# Altium PCB PCB1.PcbDoc
Units mil, origin at the board's own origin, x right, y up, seen from the top; angles counter-clockwise.
Board outline 1496.06 x 1519.69 mil, 4 copper layers (Top Layer, Internal Plane 1, Internal Plane 2, Bottom Layer); 24 components, 31 nets, 133 pads, 22 vias.
Unrouted connection lines stored in the file: 1.
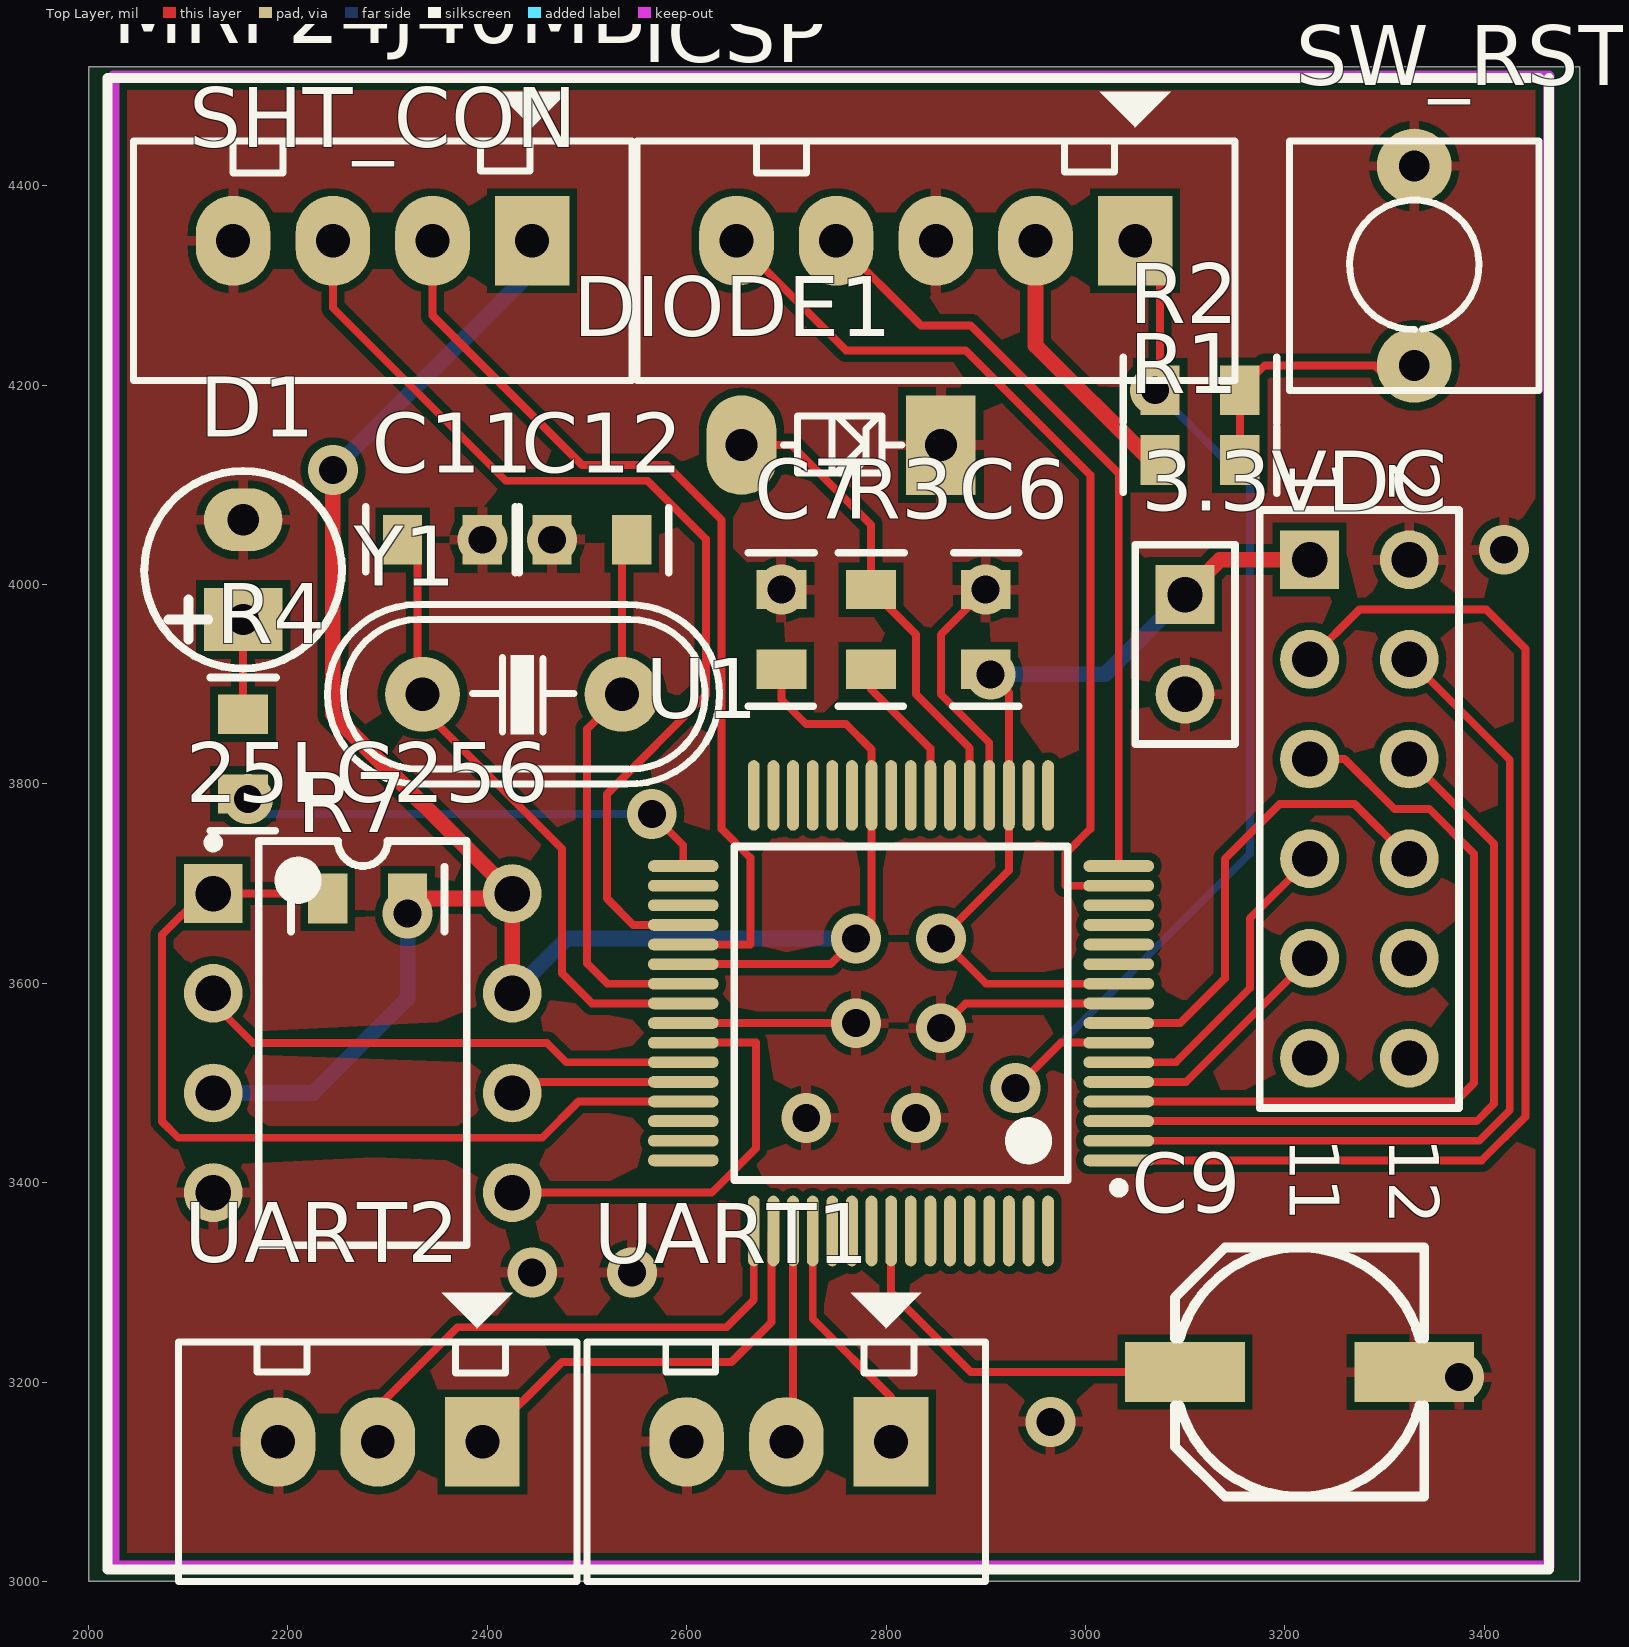
[diagram p0: Top Layer view]
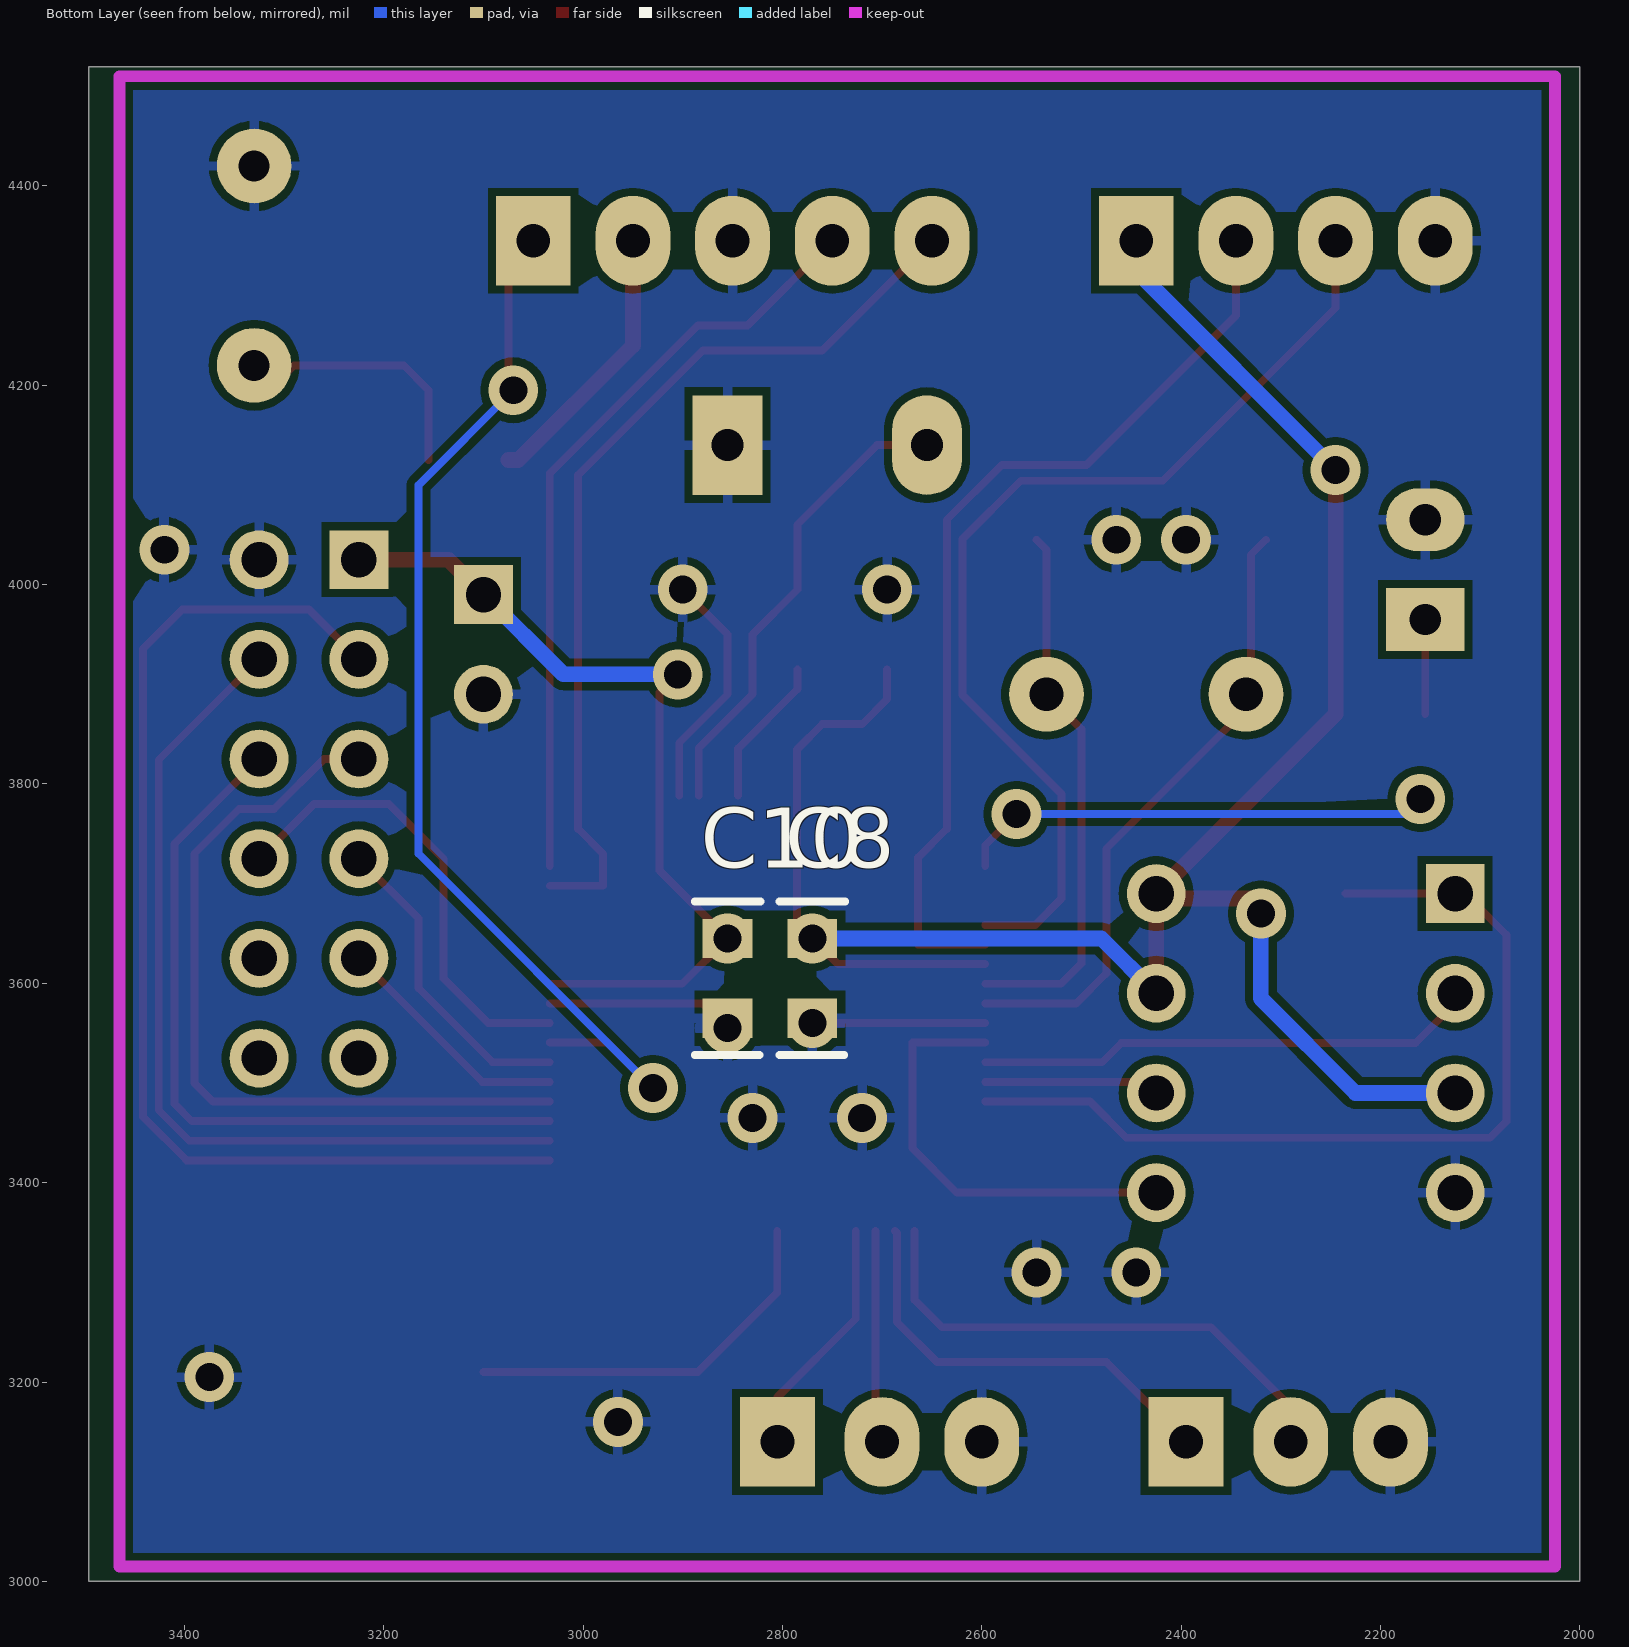
[diagram p1: Bottom Layer view, seen from below]
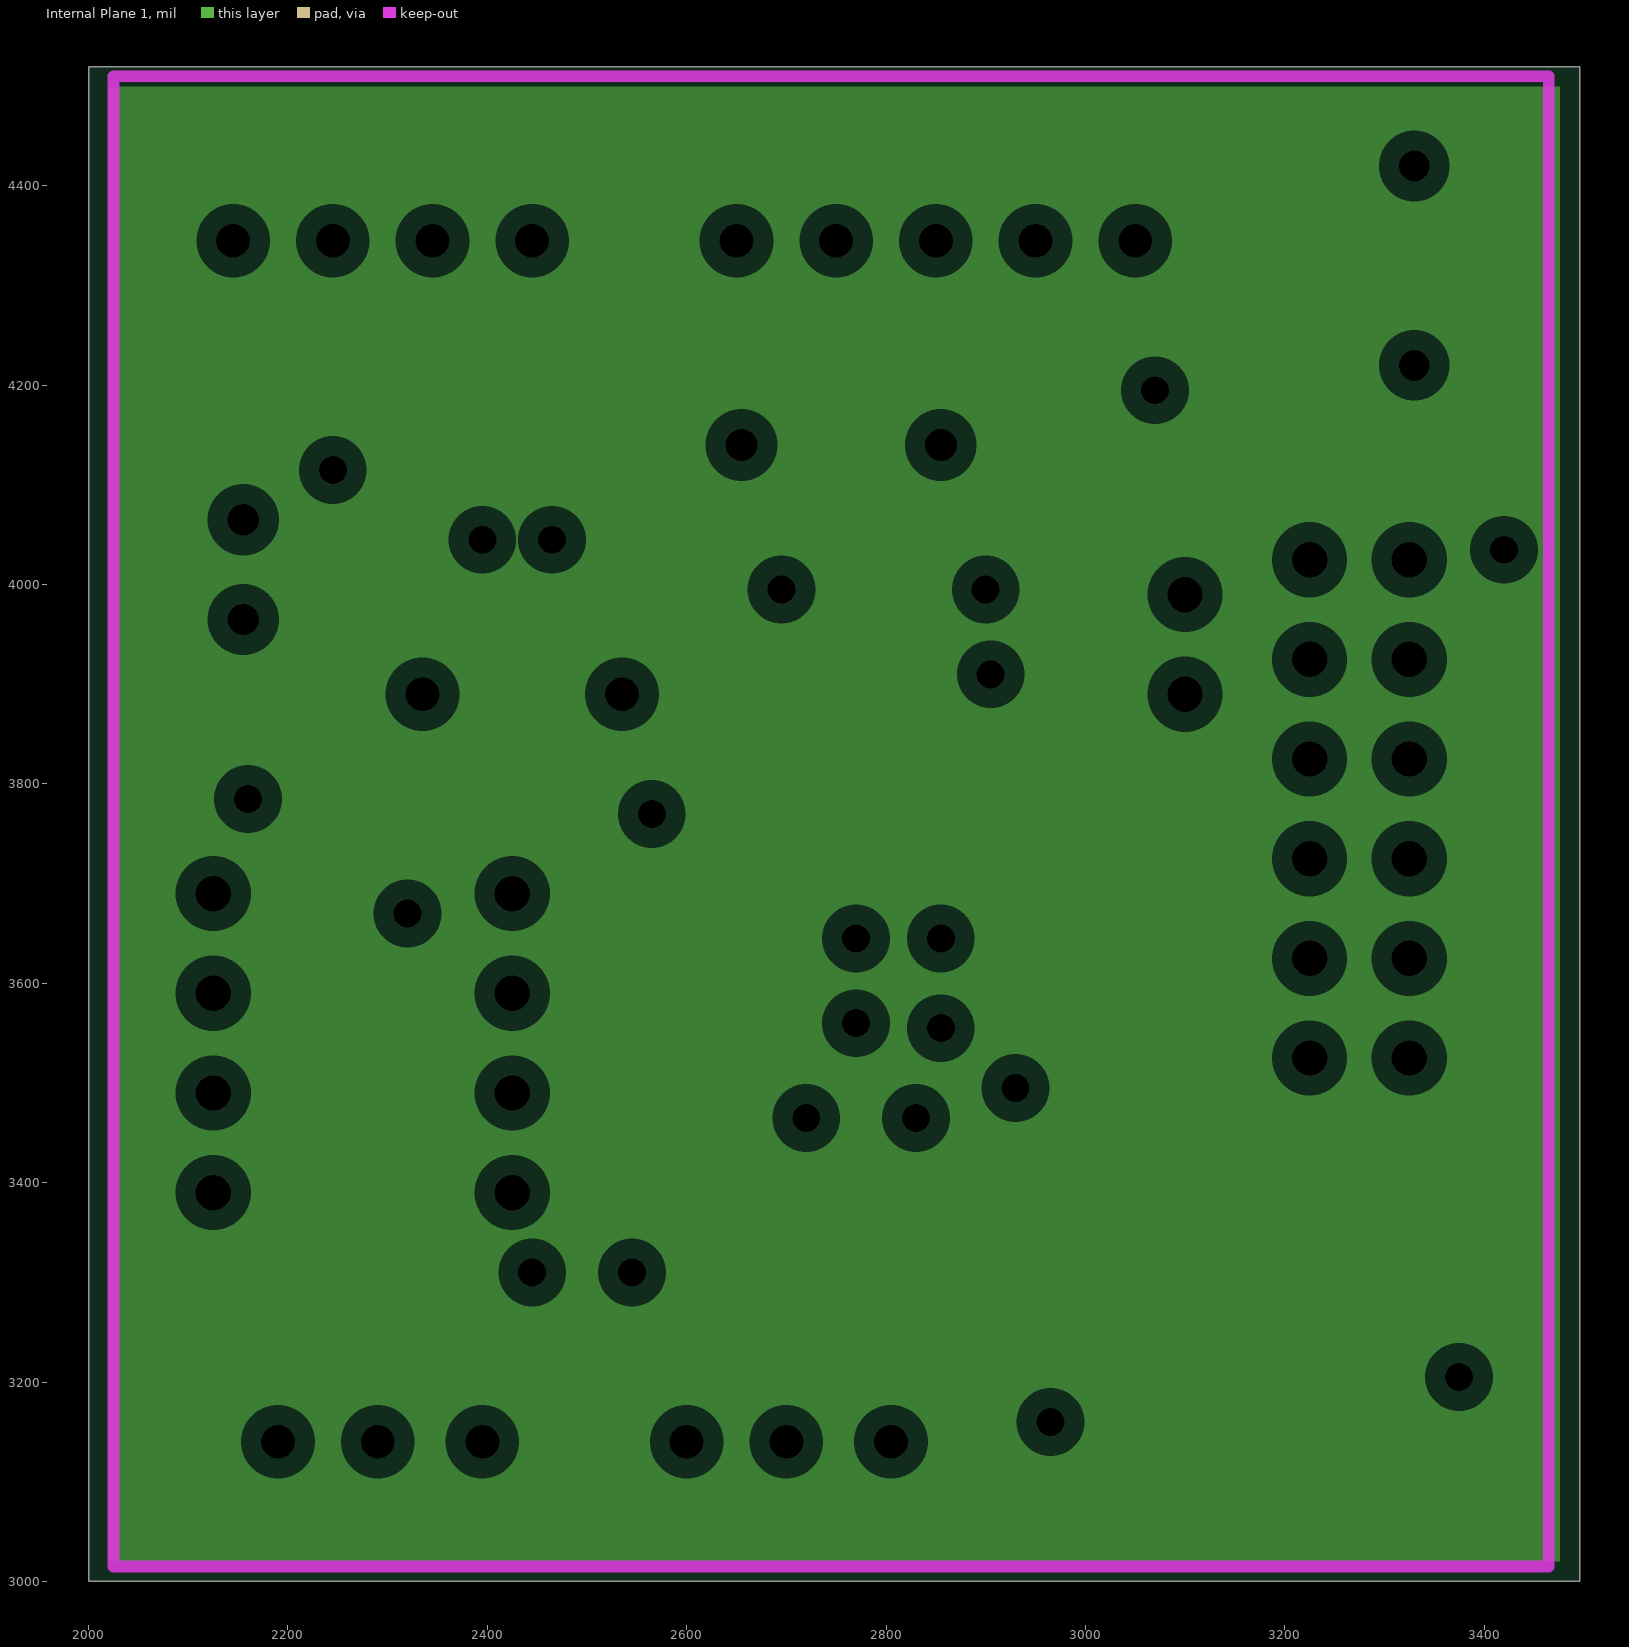
[diagram p2: Internal Plane 1, clearances drawn from the general rule]
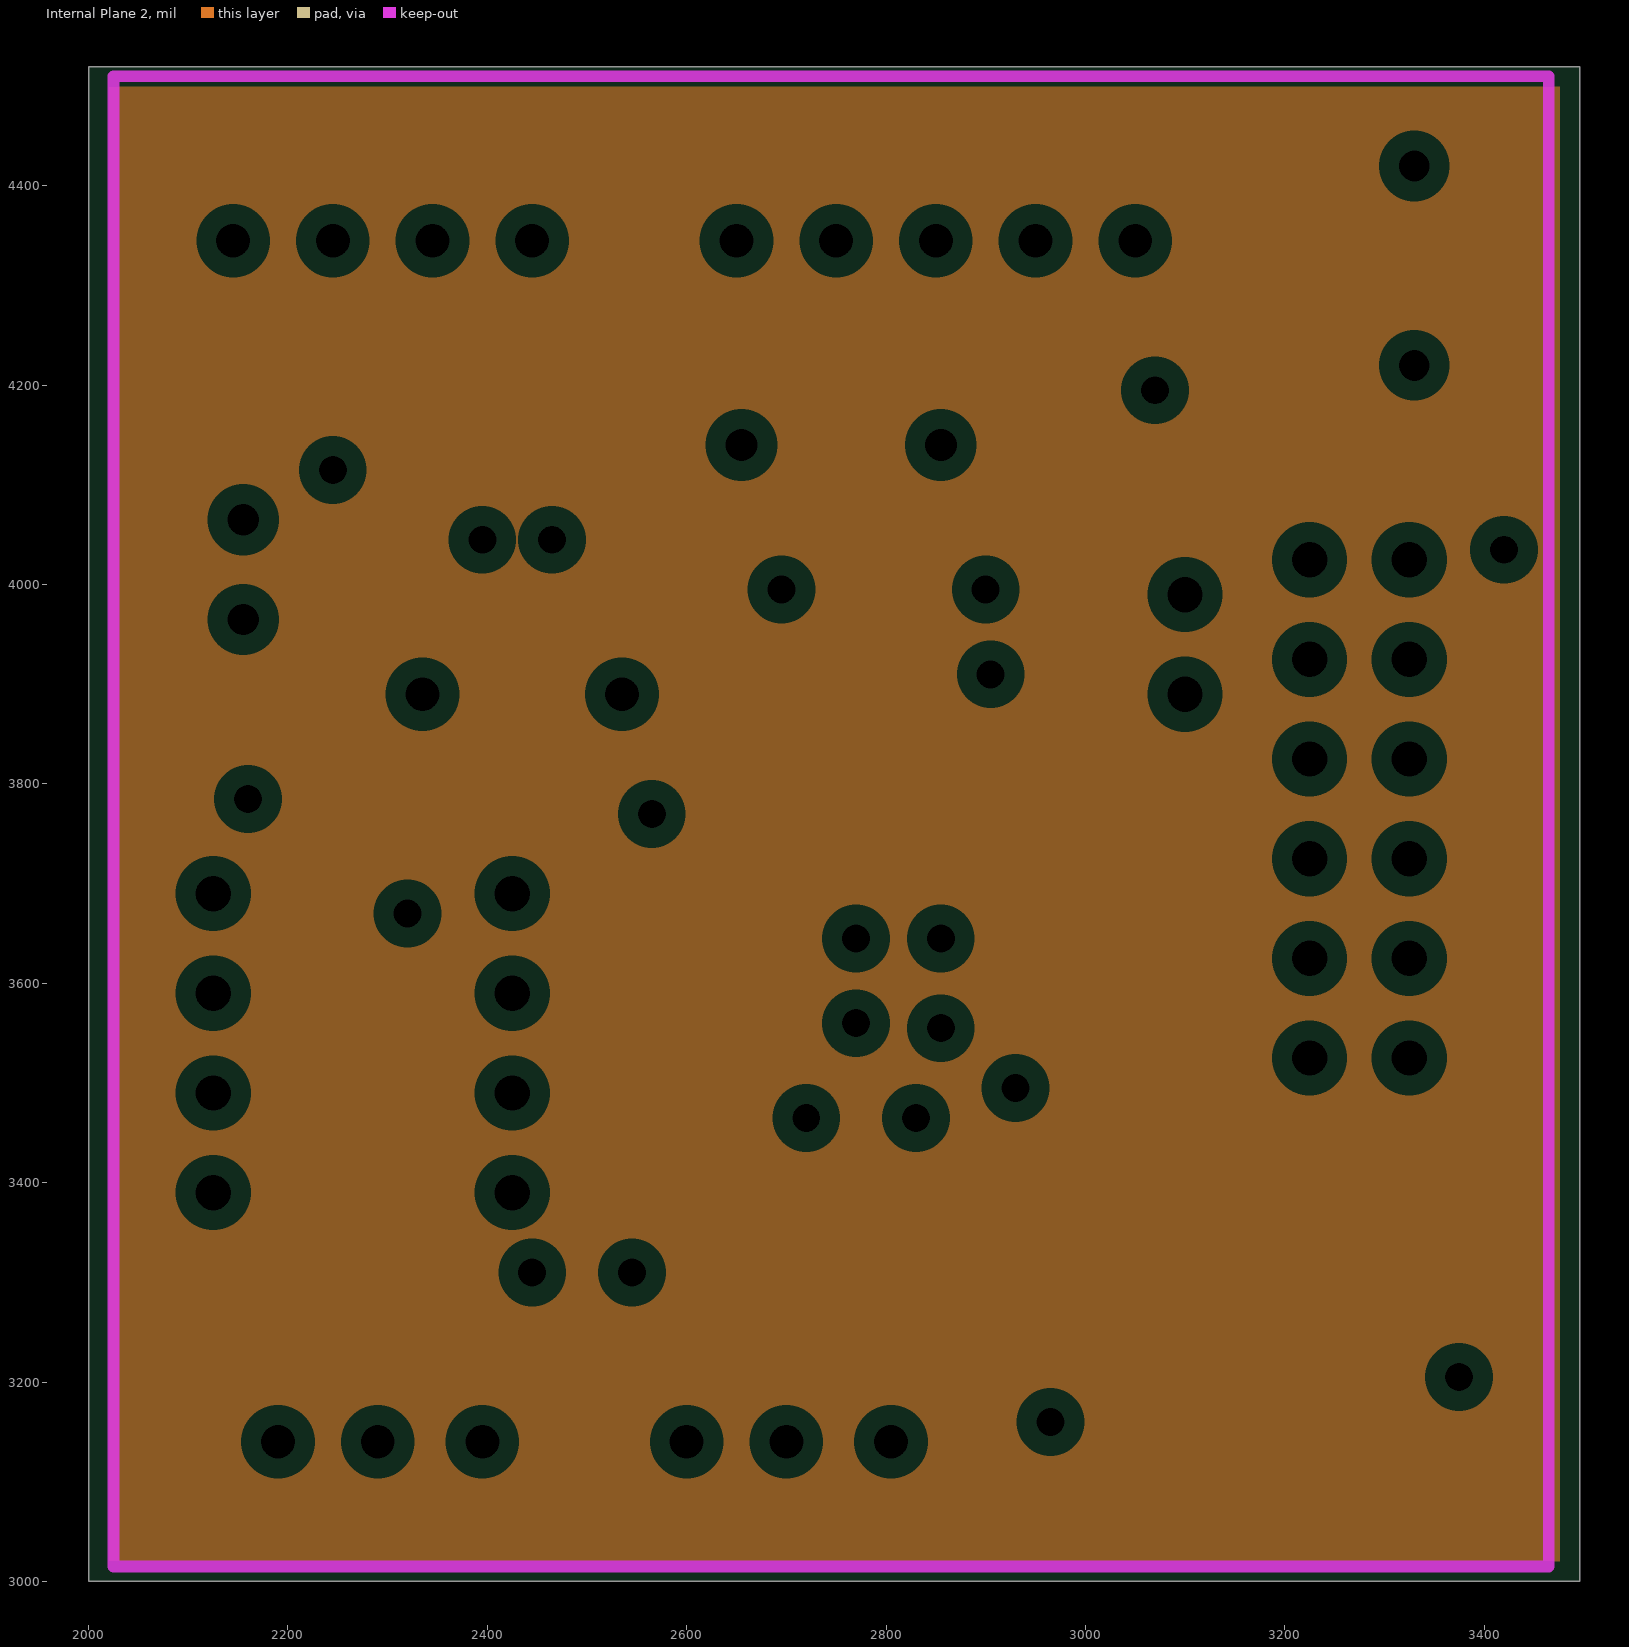
[diagram p3: Internal Plane 2, clearances drawn from the general rule]
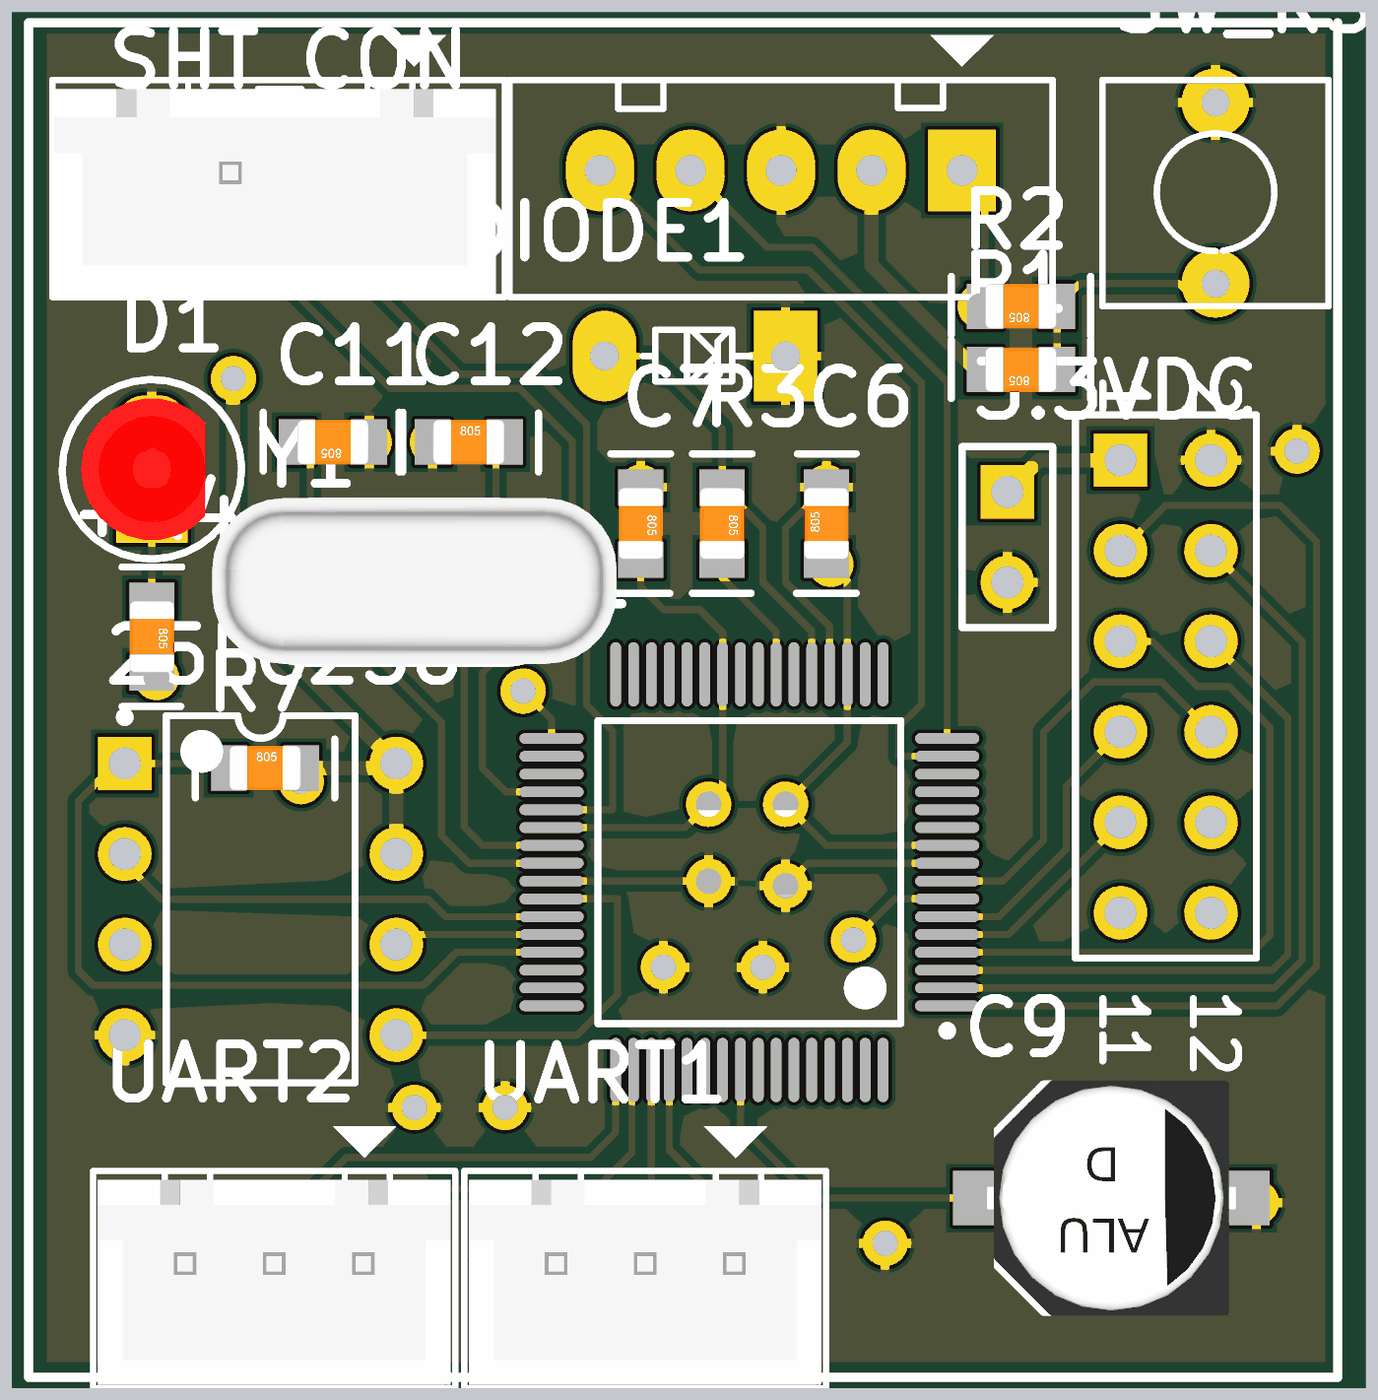
[diagram p4: 3D render of the assembled board from above, using the file's embedded part models]

## Layer stack, top to bottom
Top Solder: solder mask 0.4, Solder Resist, Dk 3.5
Top Layer: signal copper 1.4
Dielectric1: dielectric 12.6, FR-4, Dk 4.8
Internal Plane 1: plane copper 1.4
Dielectric2: dielectric 12.6, FR-4, Dk 4.8
Internal Plane 2: plane copper 1.4
Dielectric3: dielectric 12.6, FR-4, Dk 4.8
Bottom Layer: signal copper 1.4
Bottom Solder: solder mask 0.4, Solder Resist, Dk 3.5

## Board outline
2000,3000 3496.06,3000 3496.06,4519.69 2000,4519.69

## Design rules (kind name [scope] priority, off if disabled: settings)
Clearance [All] p1: gap=7.87
PlaneClearance [All] p1: clearance=20
PlaneConnect [All] p1: planeconnectstyle=Relief reliefexpansion=20 reliefentries=4 reliefconductorwidth=10 reliefairgap=10
PolygonConnect [All] p1: connectstyle=Relief reliefconductorwidth=10 reliefentries=4 polygonreliefangle="90 Angle" airgapwidth=10
RoomDefinition Sheet1 [InComponentClass('Sheet1')] p1: confinementstyle=ConfineIn formatcopy=TRUE lockcomponents=FALSE outline 3540,3060 11725,3060 11725,4680 3540,4680
RoutingVias [All] p1: holewidth=23.62 width=39.37 viastyle="Through Hole" minholewidth=28 minwidth=50 maxholewidth=28 maxwidth=50
SilkToSolderMaskClearance SilkscreenOverComponentPads [IsPad] p1: minsilkscreentomaskgap=10 clearancetoexposedcopper=TRUE
SolderMaskExpansion [All] p1: expansion=4
UnpouredPolygon [All] p1: allowunpoured=FALSE
Width [All] p1: maxlimit=7.87 minlimit=7.87 preferedwidth=7.87
26 further rules are at their usual default settings.

## Components (designator, comment, footprint, x,y, rotation, side; value= is the part's Value field where it differs from the comment)
3.3VDC "OUT 3.3V" HDR1X2 3100,3990 r270 top
25LC256 "25LC256" DIP-8 2275,3540 r0 top
C6 "Cap" C0805 2900,3955 r90 top
C7 "Cap" C0805 2695,3955 r270 top
C8 "Cap" C0805 2770,3605 r270 bottom
C9 "Cap2" "CAP P 6.3x5.4" 3215,3210 r180 top
C10 "Cap" C0805 2855,3605 r270 bottom
C11 "Cap" C0805 2355,4045 r180 top
C12 "Cap" C0805 2505,4045 r0 top
D1 "LED nguon" LED3mm 2155,4015 r90 top
DIODE1 "Diode" DZ0.5A 2655,4140 r180 top
ICSP "ICSP" CON5 3050,4345 r180 top
MRF24J40MB "Header 6X2" MRF24J40MB_board_mini 3375,4075 r180 top locked
R1 "Res1" C0805 3115,4125 r180 top
R2 "res" C0805 3115,4195 r180 top
R3 "Res1" C0805 2785,3955 r270 top
R4 "Res1" C0805 2155,3830 r270 top
R7 "Res Semi" C0805 2280,3685 r0 top
SHT_CON "SHT10 conector" CON4 2445,4345 r180 top
SW_RST "SW" SW2 3330,4420 r270 top
U1 "PIC24FJ128GA306" TQFP-PT64_N 2815,3570 r180 top
UART1 "UART1" CON3 2800,3140 r180 top
UART2 "UART2" CON3 2390,3140 r180 top
Y1 "XTAL" XT2 2435,3890 r180 top

## Footprints (in the part's own frame and the unit in brackets; to place one, negate y for a bottom-side part, rotate by r counter-clockwise, add the part's x,y. Pads: shape width x height; smd on the part's side, far side on the other; paste and mask are expansions set on the pad)
C0805 [mil] "Chip Resistor; Body 2.0 x 1.3 mm (LxW typ)"
  rect 39.37x50 smd: 1(-40,0) 2(40,0)
  silkscreen extent -77,-33 77,33, body extent -39,-25 39,25, height 31
"CAP P 6.3x5.4" [mil]
  rect 120x60 smd: 1(115,0) 2(-115,0)
  silkscreen extent -125,-125 125,125, body extent -138,-130 138,130, height 213
CON3 [mil] "CON 3"
  rect 75x90 hole 34: 1(-5,0)
  oval 75x90 hole 34: 2(100,0) 3(200,0)
  silkscreen extent -100,-150 300,140, body extent -95,-90 295,136, height 276
CON4 [mil] "CON4"
  rect 75x90 hole 34: 1(0,0)
  oval 75x90 hole 34: 2(100,0) 3(200,0) 4(300,0)
  silkscreen extent -100,-150 400,140, body extent -90,-90 398,136, height 276
CON5 [mil] "CON5"
  rect 75x90 hole 34: 1(0,0)
  oval 75x90 hole 34: 2(100,0) 3(200,0) 4(300,0) 5(400,0)
  silkscreen extent -100,-150 500,140
DIP-8 [mm] "DIP; 8 Leads; Row Spacing 7.62 mm; Pitch 2.54 mm"
  rect 1.5x1.5 hole 0.9: 1(-3.81,3.81)
  round 1.5 hole 0.9: 2(-3.81,1.27) 3(-3.81,-1.27) 4(-3.81,-3.81) 5(3.81,-3.81) 6(3.81,-1.27) 7(3.81,1.27) 8(3.81,3.81)
  silkscreen extent -3.93,-5.15 2.65,5.23, body extent -3.6,-5.15 3.6,5.15, height 5.08
DZ0.5A [mil] "Diode Zenner, W 80mil, L 300mil"
  oval 70x100 hole 32: 1(0,0)
  rect 70x100 hole 32: 2(-200,0)
  silkscreen extent -161,-29 -42,28
HDR1X2 [mm] "Connector; Header; 2 Position"
  rect 1.5x1.5 hole 0.9: 1(0,0)
  round 1.5 hole 0.9: 2(2.54,0)
  silkscreen extent -1.27,-1.27 3.81,1.27
LED3mm [mm]
  rect 1.6x2 hole 0.8: 1(-1.27,0)
  oval 1.6x2 hole 0.8: 2(1.27,0)
  silkscreen extent -2.52,-2.51 2.51,2.52, body extent -1.99,-1.5 1.99,1.99, height 5.38
MRF24J40MB_board_mini [mm]
  rect 1.5x1.5 hole 0.9: 1(3.81,1.27)
  round 1.5 hole 0.9: 2(1.27,1.27) 3(3.81,3.81) 4(1.27,3.81) 5(3.81,6.35) 6(1.27,6.35) 7(3.81,8.89) 8(1.27,8.89) 9(3.81,11.43) 10(1.27,11.43) 11(3.81,13.97) 12(1.27,13.97)
  silkscreen extent -2.29,-11 34.45,27, body extent 0,0 5.08,15.24, height 7
SW2 [mil] "SW button 2pin, 250x 250 mil"
  round 75 hole 31: 1(0,0) 2(200,0)
  silkscreen extent -25,-125 225,125
TQFP-PT64_N [mm] "Thin QFP, 64-Leads, Body 10x10mm, Pitch 0.5mm, IPC Medium Density"
  oval 1.8x0.3 smd: 1(-5.55,3.75) 2(-5.55,3.25) 3(-5.55,2.75) 4(-5.55,2.25) 5(-5.55,1.75) 6(-5.55,1.25) 7(-5.55,0.75) 8(-5.55,0.25) 9(-5.55,-0.25) 10(-5.55,-0.75) 11(-5.55,-1.25) 12(-5.55,-1.75) 13(-5.55,-2.25) 14(-5.55,-2.75) 15(-5.55,-3.25) 16(-5.55,-3.75) 33(5.55,-3.75) 34(5.55,-3.25) 35(5.55,-2.75) 36(5.55,-2.25) 37(5.55,-1.75) 38(5.55,-1.25) 39(5.55,-0.75) 40(5.55,-0.25) 41(5.55,0.25) 42(5.55,0.75) 43(5.55,1.25) 44(5.55,1.75) 45(5.55,2.25) 46(5.55,2.75) 47(5.55,3.25) 48(5.55,3.75)
  oval 0.3x1.8 smd: 17(-3.75,-5.55) 18(-3.25,-5.55) 19(-2.75,-5.55) 20(-2.25,-5.55) 21(-1.75,-5.55) 22(-1.25,-5.55) 23(-0.75,-5.55) 24(-0.25,-5.55) 25(0.25,-5.55) 26(0.75,-5.55) 27(1.25,-5.55) 28(1.75,-5.55) 29(2.25,-5.55) 30(2.75,-5.55) 31(3.25,-5.55) 32(3.75,-5.55) 49(3.75,5.55) 50(3.25,5.55) 51(2.75,5.55) 52(2.25,5.55) 53(1.75,5.55) 54(1.25,5.55) 55(0.75,5.55) 56(0.25,5.55) 57(-0.25,5.55) 58(-0.75,5.55) 59(-1.25,5.55) 60(-1.75,5.55) 61(-2.25,5.55) 62(-2.75,5.55) 63(-3.25,5.55) 64(-3.75,5.55)
  silkscreen extent -5.68,-4.25 4.25,4.57, body extent -5,-5 5,5, height 1.2
XT2 [mil] "Footpin for Crystal 2 pin"
  round 75 hole 34: 1(-100,0) 2(100,0)
  silkscreen extent -198,-90 195,90, body extent -233,-93 213,90, height 138

## Part data
3.3VDC: library part "Header 2", "Header, 2-Pin"
C6 C7 C8 C9 C10 C11 C12: "Capacitor"
D1: library part LED0, "Typical INFRARED GaAs LED"
DIODE1: "Default Diode"
ICSP: library part "Header 5", "Header, 5-Pin"
MRF24J40MB: "Header, 6-Pin, Dual row"
R1 R3 R4: "Resistor"
R2: library part Res1, "Resistor"
R7: "Semiconductor Resistor"
SHT_CON: library part "Header 4", "Header, 4-Pin"
SW_RST: library part SW2, "Switch button 2 pin"
UART1 UART2: library part Con3, "Connector 3"
Y1: "Crystal Oscillator"

## Via types
v1: diameter 50, hole 28, Top Layer to Bottom Layer, 22 vias

## Nets (pads, with @x,y where several pads share a name; then routed paths per layer and width w, separated by ;. In a path a pad name is that pad's centre, name@x,y a point inside that pad or via, vN(x,y) a via of type N, cw(c..) or ccw(c..) an arc to the next point about the centre after c; other vN are vias at no path point)
3.3VDC: 3.3VDC.1 25LC256.3 25LC256.7 25LC256.8 C6.1 C7.2 C8.1 C10.1 MRF24J40MB.1 R7.2 SHT_CON.1 U1.10 U1.19 U1.26 U1.38 | length 3093.9
  Top Layer w7.87: U1.38 2744.21,3619.21 v1(2770,3645) 2785.47,3660.47 U1.26 2785.47,3834.53 2760,3860 2720,3860 2695,3885 C7.2 ; C6.1 v1(2905,3910) 2923.27,3891.73 U1.19 2923.27,3713.27 v1(2855,3645) 2900.47,3599.53 U1.10
  Top Layer w15.75: v1(2245,4115) 2245,3870 25LC256.8 25LC256.7 ; R7.2 25LC256.8@2420,3685 ; 3.3VDC.1 3135,4025 MRF24J40MB.1
  Bottom Layer w7.87: SHT_CON.1@2445,4315 SHT_CON.1
  Bottom Layer w15.75: 25LC256.3 2225,3490 2320,3585 v1(2320,3670) ; v1(2245,4115) SHT_CON.1@2445,4315 ; 25LC256.7 2480,3645 v1(2770,3645) ; v1(2905,3910) 3020,3910 3.3VDC.1
AN8: DIODE1.1 R3.1 U1.21 | length 475.6
  Top Layer w7.87: DIODE1.1 2705,4140 2785,4060 R3.1 2830,3950 2830,3890 2883.9,3836.1 U1.21
CS1: MRF24J40MB.6 U1.3 | length 764.8
  Top Layer w7.87: U1.3 3392.59,3461.73 3410,3479.15 3410,3740 MRF24J40MB.6
CS2: 25LC256.1 R7.1 U1.45 | length 900.5
  Top Layer w7.87: 25LC256.1@2115,3690 2073.66,3648.66 2073.66,3461.34 2090,3445 2455,3445 2491.42,3481.42 U1.45 ; 25LC256.1 R7.1@2235,3690
GND: 3.3VDC.2 25LC256.4 C6.2 C7.1 C8.2 C9.2 C10.2 C11.1 C12.1 D1.2 DIODE1.2 ICSP.3 MRF24J40MB.2 SHT_CON.4 SW_RST.1 U1.9 U1.20 U1.25 U1.41 UART1.3 UART2.3 | length 617.6
  Top Layer w7.87: U1.41 2769.84,3560.16 v1(2770,3560) ; v1(2855,3555) 2879.84,3579.84 U1.9 ; v1(2900,3995) 2855,3950 2855,3890 2903.58,3841.42 U1.20
  Bottom Layer w7.87: v1(2855,3555) C10.2
  other v1: 2965,3160 3375,3205 2445,3310 2545,3310 2720,3465 2830,3465 2695,3995 3420,4035 2395,4045 2465,4045
INT1_RP21: MRF24J40MB.5 U1.4 | length 798.5
  Top Layer w7.87: U1.4 3371.42,3481.42 3390,3500 3390,3730 3345,3775 3310,3775 3260,3825 MRF24J40MB.5
LED1: R4.2 U1.33 | length 483.7
  Top Layer w7.87: R4.2 v1(2160,3785) ; v1(2565,3770) 2596.5,3738.5 U1.33
  Bottom Layer w7.87: v1(2160,3785) 2175,3770 v1(2565,3770)
NetC9_1: C9.1 U1.56 | length 389.6
  Top Layer w7.87: U1.56 2805.16,3289.84 2885,3210 C9.1
NetD1_1: D1.1 R4.1 | length 95
  Top Layer w7.87: R4.1 D1.1
NetR1_1: R1.1 R2.1 SW_RST.2 | length 243.6
  Top Layer w7.87: R1.1 R2.1 3180,4220 3290,4220 SW_RST.2@3310,4200
OSCI: C12.2 U1.39 Y1.1 | length 548.6
  Top Layer w7.87: C12.2 2535,4035 Y1.1 2500,3855 2500,3620 2520.47,3599.53 U1.39
OSCO: C11.2 U1.40 Y1.2 | length 635.3
  Top Layer w7.87: C11.2 2330,4030 2330,3895 Y1.2 2335,3875 2475,3735 2475,3610 2505.16,3579.84 U1.40
PGC: ICSP.5 U1.15 | length 928.2
  Top Layer w7.87: ICSP.5 2760,4235 2880,4235 3005,4110 3005,3755 2980,3730 2980,3697.95 U1.15
PGD: ICSP.4 U1.16 | length 774.1
  Top Layer w7.87: ICSP.4 2835,4260 2885,4260 3033.5,4111.5 U1.16
RB10: R3.2 U1.23 | length 151.2
  Top Layer w7.87: R3.2 2785,3895 2844.53,3835.47 U1.23
RSTMRF: MRF24J40MB.3 U1.1 | length 1149.2
  Top Layer w7.87: U1.1 3397.76,3422.36 3441.5,3466.1 3441.5,3935.67 3402.17,3975 3275,3975 MRF24J40MB.3
SCK1_RP26: MRF24J40MB.9 U1.5 | length 242.8
  Top Layer w7.87: U1.5 3101.1,3501.1 MRF24J40MB.9
SCK2_RP3: 25LC256.6 U1.44 | length 186.1
  Top Layer w7.87: 25LC256.6@2415,3490 2426.1,3501.1 U1.44
SCL1: SHT_CON.2 U1.37 | length 955.4
  Top Layer w7.87: SHT_CON.2 2345,4270 2495,4120 2580,4120 2635,4065 2635,3755 2663.9,3726.1 2663.9,3638.9 U1.37
SDA1: SHT_CON.3 U1.36 | length 1026.9
  Top Layer w7.87: SHT_CON.3 2245,4277.73 2418.48,4104.25 2560.75,4104.25 2619.25,4045.75 2619.25,3889.25 2520,3790 2520,3685 2546.42,3658.58 U1.36
SDI1_RP27: MRF24J40MB.8 U1.8 | length 475.6
  Top Layer w7.87: U1.8 3095.16,3560.16 3140,3605 3140,3725 3195,3780 3270,3780 MRF24J40MB.8
SDI2_RP4: 25LC256.2 U1.43 | length 510.2
  Top Layer w7.87: 25LC256.2@2115,3590 2165,3540 2460,3540 2479.21,3520.79 U1.43
SDO1_RP19: MRF24J40MB.7 U1.6 | length 317.1
  Top Layer w7.87: U1.6 3090.79,3520.79 3165,3595 3165,3665 MRF24J40MB.7
SDO2_RP2: 25LC256.5 U1.42 | length 451.9
  Top Layer w7.87: 25LC256.5@2415,3390 2625,3390 2669.53,3434.53 2669.53,3540.47 U1.42
U1RX_RP22: U1.51 UART1.2 | length 214.3
  Top Layer w7.87: UART1.2 2706.73,3146.73 U1.51
U1TX_RP25: U1.52 UART1.1 | length 244
  Top Layer w7.87: U1.52 2726.42,3263.58 2805,3185 UART1.1
U2RX_RP24: U1.49 UART2.2 | length 526
  Top Layer w7.87: UART2.2 2290,3175 2370,3255 2640,3255 2667.36,3282.36 U1.49
U2TX_RP23: U1.50 UART2.1 | length 432
  Top Layer w7.87: UART2.1 2475,3220 2645,3220 2685.08,3260.08 2685.08,3349.53 U1.50
VCC: ICSP.2 R1.2 | length 277.6
  Top Layer w15.75: ICSP.2 2950,4240 3065,4125 R1.2
VPP: ICSP.1 R2.2 U1.7 | length 1119.4
  Top Layer w7.87: v1(2930,3495) 2975.47,3540.47 U1.7 ; ICSP.1 3075,4320 R2.2
  Bottom Layer w7.87: v1(2930,3495) 3165,3730 3165,4100 v1(3070,4195)
WAKE: MRF24J40MB.4 U1.2 | length 899
  Top Layer w7.87: U1.2 3395.17,3442.05 3425.75,3472.62 3425.75,3824.25 MRF24J40MB.4
pads on no net: MRF24J40MB.10 MRF24J40MB.11 MRF24J40MB.12 U1.11 U1.12 U1.13 U1.14 U1.17 U1.18 U1.22 U1.24 U1.27 U1.28 U1.29 U1.30 U1.31 U1.32 U1.34 U1.35 U1.46 U1.47 U1.48 U1.53 U1.54 U1.55 U1.57 U1.58 U1.59 U1.60 U1.61 U1.62 U1.63 U1.64

## Polygon pours and split planes (outlines as drawn)
GND on Top Layer "Top Layer-No Net" (solid, pour order 17): 2025,4510 3460,4510 3465,4505 3465,3015 2025,3015
GND on Bottom Layer "Top Layer-No Net" (solid, pour order 19): 2025,4500 2035,4510 3465,4510 3465,3015 3455,3025 2025,3025
no net on Internal Plane 1 (split plane): 3475.97,3020.1 2020.1,3020.1 2020.1,4499.59 3475.97,4499.59
no net on Internal Plane 2 (split plane): 3475.97,3020.1 2020.1,3020.1 2020.1,4499.59 3475.97,4499.59

## Keep-outs
Keep-Out Layer:
  lines w11.81: 2025,3015 3465,3015 3465,4510 2025,4510 2025,3015

## Silkscreen, mask and mechanical layers (free items; w line width, h text height)
Drill Drawing:
  text ".LEGEND" at 3696.06,3200 h60
  text "Drill Drawing." at 3696.06,3100 h60

## Dimensions
2025,3015 to 3465,3015 on Mechanical 1
2025,3015 to 2025,4510 on Mechanical 1

## Text inside footprints (layer, text, board x,y; h text height)
MRF24J40MB: Top Overlay "2" at 3305,4125 h50 r270; Top Overlay "1" at 3205,4125 h50 r270; Top Overlay "1" at 3205,3445 h50 r270; Top Overlay "1" at 3205,3405 h50 r270; Top Overlay "12" at 3305,3445 h50 r270